# Altium PCB FOOTPRINT.PcbDoc (part 2 of 2)
Units mm, origin at the board's own origin, x right, y up, seen from the top; angles counter-clockwise.
Board outline 50 x 70 mm, 4 copper layers (Top Layer, Int1 (GND), Int2 (PWR), Bottom Layer), stack 1.446 mm thick; 76 components, 55 nets, 299 pads, 366 vias.
Unrouted connection lines stored in the file: 3.
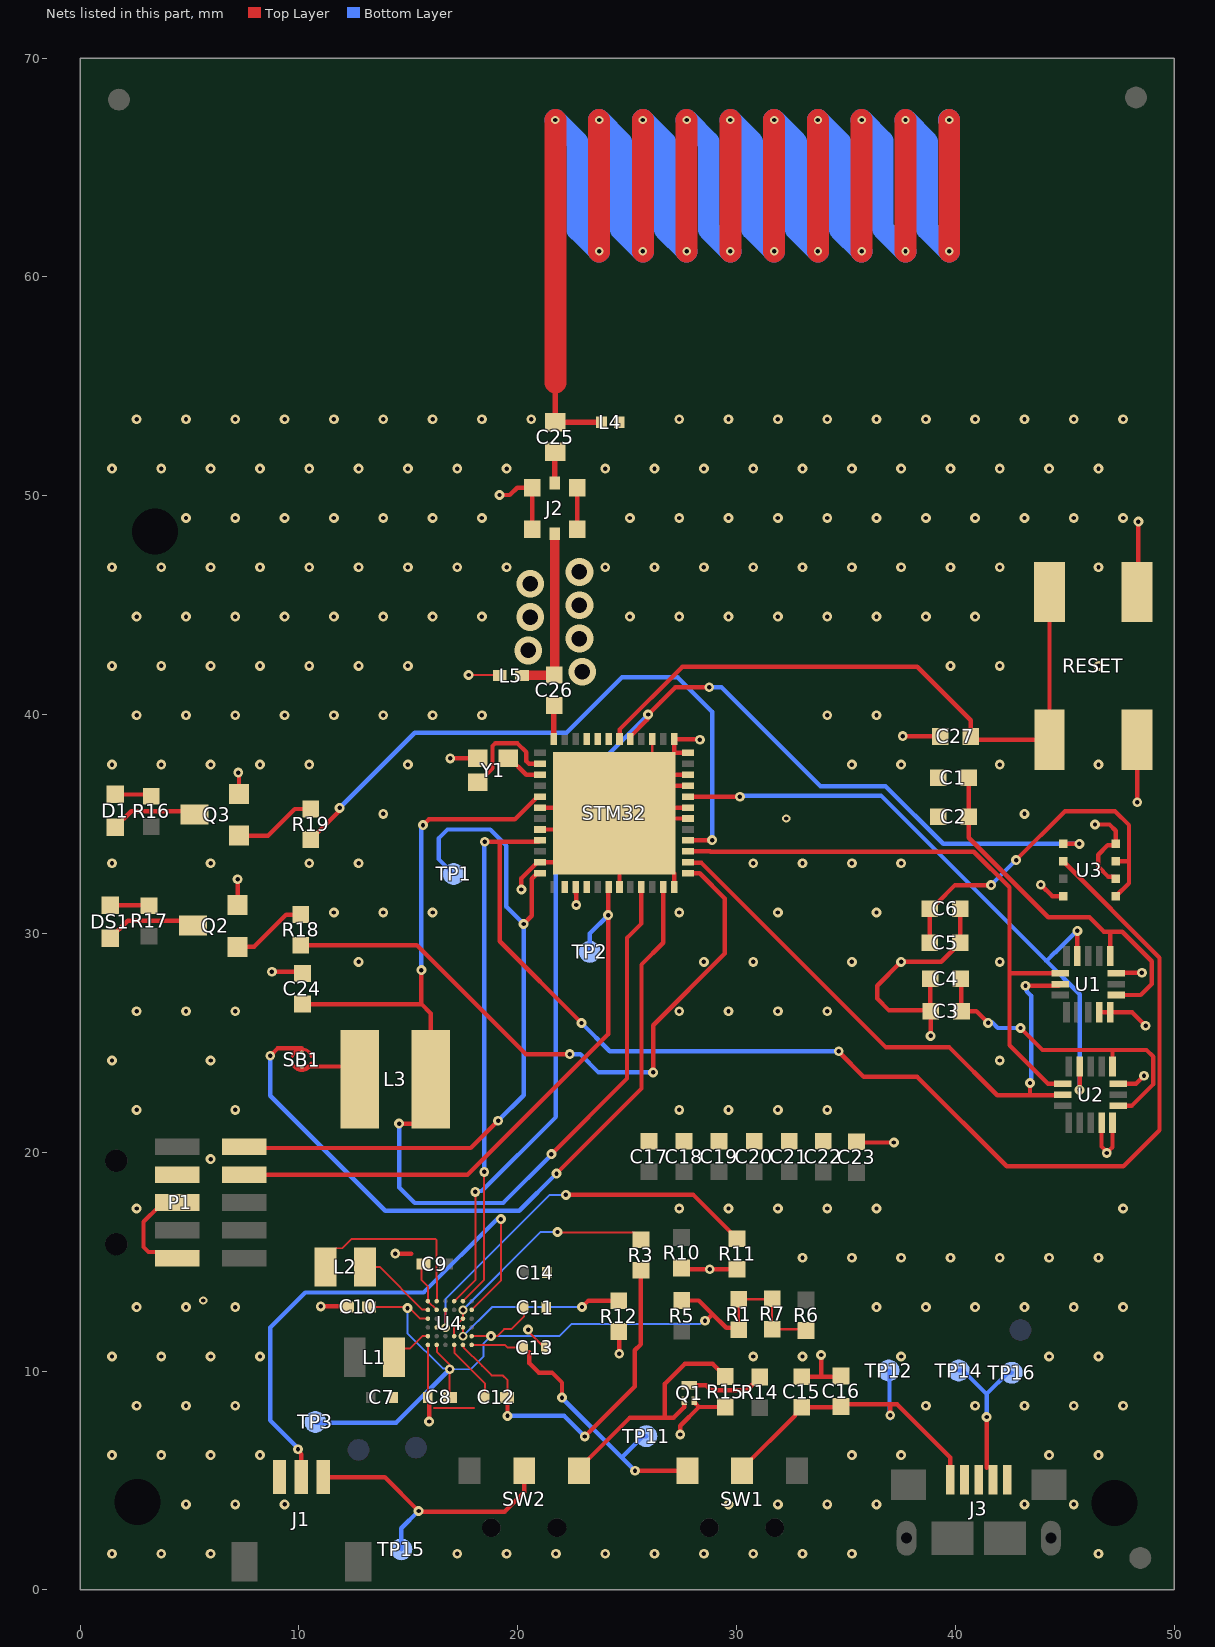
[diagram p4: the nets of this part, all layers, seen from the top]

## Via types
v1: diameter 0.45, hole 0.2, Top Layer to Bottom Layer, 334 vias
v2: diameter 0.38, hole 0.2, Top Layer to Bottom Layer, 21 vias
v3: diameter 1.27, hole 0.711, Top Layer to Bottom Layer, 7 vias
v4: diameter 0.4, hole 0.22, Top Layer to Bottom Layer, 4 vias

## Nets (pads, with @x,y where several pads share a name; then routed paths per layer and width w, separated by ;. In a path a pad name is that pad's centre, name@x,y a point inside that pad or via, vN(x,y) a via of type N, cw(c..) or ccw(c..) an arc to the next point about the centre after c; other vN are vias at no path point) (continued)
GND: C1.2 C2.2 C3.2 C4.2 C5.2 C6.2 C7.2 C8.2 C9.2 C10.2 C11.2 C12.2 C13.2 C14.2 C15.2 C16.2 C17.2 C18.2 C19.2 C20.2 C21.2 C22.2 C23.2 C24.2 C27.2 J1.1 J2.2 J3.2 J3.3 J3.4 J3.5 L4.2 L5.2 P1.3 P1.5 P1.9 Q1.2 Q2.E Q3.E R10.1 R11.2 R12.2 R15.2 RESET.2 STM32.6 STM32.7 STM32.9 STM32.10 STM32.12 STM32.13 STM32.15 STM32.19 STM32.20 STM32.21 STM32.30 STM32.32 STM32.35 STM32.38 STM32.39 STM32.40 STM32.43 STM32.48 STM32.49 TP14.1 TP16.1 U1.12 U1.13 U1.16 U2.12 U2.13 U2.16 U3.1 U3.5 U3.7 U4.A1 U4.B2 U4.F1 U4.F4 Y1.4 | length 122.4
  Top Layer w0.09: C9.2@15.697,14.884 15.596,14.783 15.596,14.173 15.896,13.873 15.896,13.204 U4.A1@15.9,13.2 ; C8.2@15.884,8.8 15.896,8.812 U4.F1@15.896,11.196 ; U4.A1@15.896,13.196 U4.B2@16.296,12.796 ; 16.18,8.306 18.009,8.306 ; U4.F4@17.1,11.2 17.1,10.84 18.5,9.44 C12.2@18.5,8.8 ; C14.2@21.316,14.5 C14.2@21.316,14.636
  Top Layer w0.102: P1.9@4.445,15.164 5.08,15.164 P1.9@5.409,15.493 ; P1.5@4.445,17.704 P1.5@5.08,17.704 ; Q2.E@7.188,31.293 Q2.E@7.214,31.318 ; C24.2@10.084,28.245 C24.2@10.16,28.169 ; C10.2@12.167,12.954 C10.2@12.192,12.929 ; v1(17.755,41.808) 19.152,41.808 L5.2@19.177,41.783 ; Y1.4@18.156,37.998 Y1.4@18.172,38.015 ; v1(20.475,11.893) 20.475,11.81 21.211,11.074 C13.2@21.274,11.074 ; J2.2@20.667,48.445 J2.2@20.667,48.47 ; STM32.35@20.9,33.25 STM32.35@21.025,33.25 ; STM32.38@22.15,32 STM32.38@22.15,32.125 ; STM32.49@22.15,33.25 23.65,34.75 STM32.49@24.4,35.5 ; J2.2@22.717,50.37 J2.2@22.717,50.395 ; STM32.49@23.15,36.75 24.15,35.75 STM32.49@24.4,35.5 ; R12.2@24.612,11.811 R12.2@24.638,11.785 ; STM32.15@26.15,38.875 STM32.49@26.15,37.25 ; STM32.49@27.15,32.75 24.65,35.25 STM32.49@24.4,35.5 ; STM32.49@27.15,38.25 STM32.49@26.15,37.25 ; Q1.2@28.063,8.647 Q1.2@28.094,8.616 ; C22.2@33.958,20.5 C22.2@33.96,20.498 ; C23.2@35.458,20.498 C23.2@35.484,20.472 C23.2@35.509,20.447 ; v1@37.567,39.014 v1(37.592,39.014) ; C3.2@38.865,26.437 C3.2@38.878,26.45 ; C27.2@39.286,39.014 C27.2@39.3,39 ; J3.5@42.366,5.037 J3.5@42.366,5.512 ; v1@46.914,20.025 v1@46.967,20.025 ; U1.16@47.351,28.186 U1.16@47.367,28.203 ; RESET.2@48.3,38.85 RESET.2@48.311,38.839 ; RESET.2@48.3,45.6 RESET.2@48.362,45.662 ; STM32.49@24.4,35.5 24.65,35.75 25.65,36.75 STM32.49@26.15,37.25
  Top Layer w0.127: L4.2@24.455,53.184 L4.2@24.637,53.365
  Top Layer w0.2: P1.5@3.6,17.525 2.9,16.825 2.9,15.672 3.128,15.444 4.165,15.444 P1.9@4.445,15.164 ; v1(7.2,32.475) 7.2,31.532 7.1,31.432 Q2.E@7.214,31.318 ; v1(7.225,37.35) 7.264,37.311 Q3.E@7.264,36.373 ; v1(8.763,28.245) C24.2@10.084,28.245 ; v1(10.998,12.954) C10.2@12.167,12.954 ; v1(14.402,15.367) 15.138,15.367 ; v1(15.951,7.696) 15.951,8.458 ; v1(16.916,37.998) Y1.4@18.156,37.998 ; v1(19.167,50.035) 19.638,50.035 19.974,50.37 J2.2@20.667,50.37 J2.2@20.667,48.47 ; v1(20.168,32.004) 20.168,32.518 STM32.35@20.9,33.25 ; STM32.35@21.025,33.25 STM32.49@22.15,33.25 ; STM32.32@21.025,34.75 STM32.49@23.65,34.75 ; STM32.30@21.025,35.75 STM32.49@24.15,35.75 ; 22.65,31.825 22.675,31.8 v1(22.675,31.3) ; J2.2@22.717,48.47 J2.2@22.717,50.37 ; v1(24.638,10.795) R12.2@24.638,11.785 ; STM32.43@24.65,32.125 24.65,35.25 STM32.6@27.775,35.25 ; STM32.49@24.65,35.75 STM32.7@27.775,35.75 ; STM32.49@25.65,36.75 STM32.9@27.775,36.75 ; STM32.49@26.15,37.25 STM32.10@27.775,37.25 ; STM32.48@27.15,32.125 STM32.49@27.15,32.75 ; v1(27.425,7.1) 27.425,7.5 28.279,8.354 28.279,8.357 ; R10.1@27.483,14.707 27.54,14.65 v1(28.775,14.65) 30.017,14.65 R11.2@30.023,14.656 ; STM32.12@27.775,38.25 27.15,38.25 STM32.13@27.15,38.875 28.3,38.875 v1(28.325,38.85) ; Q1.2@28.063,8.647 28.063,8.572 28.279,8.357 ; R15.2@29.489,8.357 28.279,8.357 ; C15.2@32.975,9.747 33.861,9.747 ; v1(33.861,10.736) 33.861,9.747 ; C16.2@34.775,9.775 34.747,9.747 33.861,9.747 ; 35.903,20.447 v1(37.186,20.447) ; v1(37.592,39.014) C27.2@39.286,39.014 ; C4.2@38.853,27.925 C3.2@38.853,26.483 ; v1(38.865,25.316) C3.2@38.865,26.437 ; C3.2@38.878,26.45 38.853,26.475 C3.2@38.853,26.483 ; C6.2@40.225,31.125 40.225,29.575 39.352,28.702 37.516,28.702 36.424,27.61 36.424,27.026 36.966,26.483 C3.2@38.853,26.483 ; 41.425,5.575 v1(41.425,7.9) ; v1(43.897,32.227) 44.431,31.693 U3.1@44.926,31.693 ; v1(46.38,34.976) 47.041,34.976 47.326,34.69 U3.5@47.326,34.093 47.268,34.035 46.96,34.035 46.525,33.6 46.525,33.05 46.992,32.583 47.236,32.583 U3.7@47.326,32.493 ; U1.12@46.576,26.398 U1.13@47.076,26.398 48.074,26.398 v1(48.692,25.781) ; U2.12@46.677,21.344 46.677,20.262 v1@46.914,20.025 ; v1@46.967,20.025 47.177,20.235 U2.13@47.177,21.344 ; U1.16@47.367,28.203 v1(48.523,28.203) ; U2.16@47.452,23.131 48.252,23.131 v1(48.616,23.495) ; v1(48.311,35.992) RESET.2@48.311,38.839 ; RESET.2@48.362,45.662 v1(48.362,48.819)
  Bottom Layer w0.2: TP14.1@40.15,10.025 40.35,10.025 41.425,8.95 ; v1(41.425,7.9) 41.425,8.95 ; TP16.1@42.577,9.924 42.399,9.924 41.425,8.95
  other v1: 1.457,1.652 3.711,1.652 5.965,1.652 17.235,1.652 19.489,1.652 21.743,1.652 23.997,1.652 26.251,1.652 28.505,1.652 30.759,1.652 33.013,1.652 35.267,1.652 46.537,1.652 4.838,3.906 7.092,3.906 9.346,3.906 29.632,3.906 31.886,3.906 34.14,3.906 36.394,3.906 43.156,3.906 45.41,3.906 1.457,6.16 3.711,6.16 5.965,6.16 8.219,6.16 35.267,6.16 37.521,6.16 44.283,6.16 46.537,6.16 2.584,8.414 4.838,8.414 7.092,8.414 38.648,8.414 40.902,8.414 43.156,8.414 45.41,8.414 47.664,8.414 1.457,10.668 3.711,10.668 5.965,10.668 8.219,10.668 30.759,10.668 33.013,10.668 37.521,10.668 44.283,10.668 46.537,10.668 2.584,12.922 4.838,12.922 7.092,12.922 36.394,12.922 38.648,12.922 40.902,12.922 43.156,12.922 45.41,12.922 47.664,12.922 33.013,15.176 35.267,15.176 37.521,15.176 39.775,15.176 42.029,15.176 44.283,15.176 46.537,15.176 2.584,17.43 27.378,17.43 29.632,17.43 31.886,17.43 34.14,17.43 36.394,17.43 47.664,17.43 5.965,19.684 46.914,19.964 2.584,21.938 7.092,21.938 27.378,21.938 29.632,21.938 31.886,21.938 34.14,21.938 1.457,24.192 5.965,24.192 42.029,24.192 2.584,26.446 4.838,26.446 7.092,26.446 27.378,26.446 29.632,26.446 31.886,26.446 34.14,26.446 12.727,28.7 28.505,28.7 30.759,28.7 35.267,28.7 37.521,28.7 42.029,28.7 11.6,30.954 13.854,30.954 16.108,30.954 27.378,30.954 31.886,30.954 36.394,30.954 1.457,33.208 5.965,33.208 10.473,33.208 12.727,33.208 30.759,33.208 33.013,33.208 35.267,33.208 37.521,33.208 13.854,35.462 43.156,35.462 1.457,37.716 3.711,37.716 5.965,37.716 8.219,37.716 10.473,37.716 14.981,37.716 35.267,37.716 37.521,37.716 42.029,37.716 46.537,37.716 2.584,39.97 4.838,39.97 7.092,39.97 9.346,39.97 11.6,39.97 13.854,39.97 16.108,39.97 18.362,39.97 34.14,39.97 36.394,39.97 1.457,42.224 3.711,42.224 5.965,42.224 8.219,42.224 10.473,42.224 12.727,42.224 14.981,42.224 39.775,42.224 42.029,42.224 46.537,42.224 2.584,44.478 4.838,44.478 7.092,44.478 9.346,44.478 11.6,44.478 13.854,44.478 16.108,44.478 18.362,44.478 25.124,44.478 27.378,44.478 29.632,44.478 31.886,44.478 34.14,44.478 36.394,44.478 38.648,44.478 40.902,44.478 1.457,46.732 3.711,46.732 5.965,46.732 8.219,46.732 10.473,46.732 12.727,46.732 14.981,46.732 17.235,46.732 19.489,46.732 23.997,46.732 26.251,46.732 28.505,46.732 30.759,46.732 33.013,46.732 35.267,46.732 37.521,46.732 39.775,46.732 42.029,46.732 46.537,46.732 4.838,48.986 7.092,48.986 9.346,48.986 11.6,48.986 13.854,48.986 16.108,48.986 18.362,48.986 25.124,48.986 27.378,48.986 29.632,48.986 31.886,48.986 34.14,48.986 36.394,48.986 38.648,48.986 40.902,48.986 43.156,48.986 45.41,48.986 47.664,48.986 1.457,51.24 3.711,51.24 5.965,51.24 8.219,51.24 10.473,51.24 12.727,51.24 14.981,51.24 17.235,51.24 19.489,51.24 23.997,51.24 26.251,51.24 28.505,51.24 30.759,51.24 33.013,51.24 35.267,51.24 37.521,51.24 39.775,51.24 42.029,51.24 44.283,51.24 46.537,51.24 2.584,53.494 4.838,53.494 7.092,53.494 9.346,53.494 11.6,53.494 13.854,53.494 16.108,53.494 18.362,53.494 20.616,53.494 27.378,53.494 29.632,53.494 31.886,53.494 34.14,53.494 36.394,53.494 38.648,53.494 40.902,53.494 43.156,53.494 45.41,53.494 47.664,53.494
  other v2: 5.625,13.225 32.275,35.25
  other v3: 22.944,41.954 20.475,42.934 22.815,43.473 20.568,44.455 22.815,44.997 20.568,45.979 22.815,46.521
ICS: R12.1 U4.D5 U4.E5 | length 8.2
  Top Layer w0.09: v4(17.496,11.596) U4.D5@17.496,11.996
  Top Layer w0.2: v1(22.936,12.929) 23.216,13.208 R12.1@24.612,13.208
  Bottom Layer w0.09: v4(17.496,11.596) 18.829,12.929 v1(22.936,12.929)
JTCK-SWCLK: P1.4 STM32.42 TP2.1 | length 28.1
  Top Layer w0.2: P1.4@7.495,18.974 P1.4@7.495,18.974 17.705,18.975 24.13,25.4 v1(24.13,30.836) 24.13,32.105 STM32.42@24.15,32.125
  Bottom Layer w0.102: v1@24.13,30.741 v1(24.13,30.836)
  Bottom Layer w0.2: TP2.1@23.292,29.159 23.292,29.997 v1(24.13,30.836)
JTMS-SWDIO: P1.2 STM32.36 TP1.1 | length 33.7
  Top Layer w0.2: P1.2@7.495,20.244 7.546,20.193 17.856,20.193 v1(19.101,21.438) ; v1(20.269,30.429) 20.645,30.805 20.645,32.495 20.85,32.7 20.975,32.7 STM32.36@21.025,32.75
  Bottom Layer w0.2: TP1.1@17.069,32.715 16.383,33.401 16.383,34.341 16.789,34.747 18.745,34.747 19.482,34.011 19.482,31.217 v1(20.269,30.429) 20.269,22.606 v1(19.101,21.438)
MISO: STM32.2 U1.7 U2.7 | length 28.3
  Top Layer w0.2: STM32.2@27.775,33.25 27.802,33.223 28.397,33.223 36.83,24.79 39.726,24.79 41.91,22.606 43.409,22.606 ; v1(43.205,27.61) 44.724,27.61 U1.7@44.801,27.686 ; v1(43.409,23.165) 43.409,22.606 ; U2.7@44.902,22.631 44.877,22.606 43.409,22.606
  Bottom Layer w0.2: v1(43.205,27.61) 43.253,27.562 43.253,27.359 43.459,27.153 43.459,23.392 43.456,23.389 43.456,23.213 v1(43.409,23.165)
MOSI: STM32.3 U1.6 U2.6 | length 28.1
  Top Layer w0.2: STM32.3@27.775,33.75 28.785,33.75 28.804,33.731 40.843,33.731 42.469,32.106 42.469,28.186 ; U1.6@44.801,28.186 42.469,28.186 ; U2.6@44.902,23.131 44.229,23.131 42.469,24.892 42.469,28.186
Net*1_1: C25.2 L4.1 | length 131.4
  Top Layer w0.254: 21.717,55.169 C25.2@21.717,53.355 21.728,53.365 L4.1@23.827,53.365
  Top Layer w1: 21.717,55.169 v2(21.717,67.169) ; v2(23.717,61.169) v2(23.717,67.169) ; v2(25.717,61.169) v2(25.717,67.169) ; v2(27.717,61.169) v2(27.717,67.169) ; v2(29.717,61.169) v2(29.717,67.169) ; v2(31.717,61.169) v2(31.717,67.169) ; v2(33.717,61.169) v2(33.717,67.169) ; v2(35.717,61.169) v2(35.717,67.169) ; v2(37.717,61.169) v2(37.717,67.169) ; v2(39.717,61.169) v2(39.717,67.169)
  Bottom Layer w1: v2(21.717,67.169) 22.733,66.153 22.733,62.153 v2(23.717,61.169) ; v2(23.717,67.169) 24.714,66.172 24.714,62.172 v2(25.717,61.169) ; v2(25.717,67.169) 26.721,66.165 26.721,62.165 v2(27.717,61.169) ; v2(27.717,67.169) 28.727,66.159 28.727,62.159 v2(29.717,61.169) ; v2(29.717,67.169) 30.709,66.177 30.709,62.177 v2(31.717,61.169) ; v2(31.717,67.169) 32.715,66.171 32.715,62.171 v2(33.717,61.169) ; v2(33.717,67.169) 34.722,66.164 34.722,62.164 v2(35.717,61.169) ; v2(35.717,67.169) 36.678,66.208 36.678,62.208 v2(37.717,61.169) ; v2(37.717,67.169) 38.71,66.176 38.71,62.176 v2(39.717,61.169) ; v2@39.713,67.173 v2(39.717,67.169)
NetC1_1: C1.1 C2.1 U1.1 U1.14 | length 17.4
  Top Layer w0.2: C1.1@40.607,37.119 40.615,37.111 C2.1@40.615,35.331 40.615,34.366 44.247,30.734 46.126,30.734 46.787,30.074 47.079,30.074 ; U1.1@47.076,28.974 47.076,30.07 47.079,30.074 ; U1.14@47.351,27.186 48.471,27.186 48.971,27.686 48.971,28.727 47.625,30.074 47.079,30.074
NetC3_1: C3.1 C4.1 U2.1 U2.14 | length 15
  Top Layer w0.2: C4.1@40.25,27.925 40.275,27.9 C3.1@40.275,26.45 40.956,26.45 v1(41.493,25.913) ; v1(42.977,25.679) 43.981,24.675 47.177,24.675 ; U2.1@47.177,23.919 47.177,24.675 ; U2.14@47.452,22.131 48.065,22.131 49.047,23.114 49.047,24.359 48.731,24.675 47.177,24.675
  Bottom Layer w0.2: v1@41.669,25.946 41.935,25.679 42.926,25.679 42.951,25.705 v1(42.977,25.679)
NetC5_1: C5.1 C6.1 U3.6 U3.8 | length 16.9
  Top Layer w0.2: C5.1@38.826,29.573 38.828,29.575 C6.1@38.828,31.125 39.109,31.406 39.181,31.406 39.982,32.207 v1(41.631,32.207) ; v1(42.774,33.35) 45.009,35.585 47.295,35.585 47.93,34.95 47.93,33.344 ; U3.8@47.326,31.693 47.93,32.296 47.93,33.344 ; U3.6@47.326,33.293 47.879,33.293 47.93,33.344
  Bottom Layer w0.2: v1(41.631,32.207) v1(42.774,33.35)
NetC25_1: C25.1 J2.1 | length 1.4
  Top Layer w0.254: J2.1@21.692,50.58 21.692,51.979 C25.1@21.717,52.005
NetC26_2: C26.2 J2.3 L5.1 | length 7.9
  Top Layer w0.254: C26.2@21.666,41.808 C26.2@21.692,41.834
  Top Layer w0.445: L5.1@20.193,41.783 20.206,41.796 21.653,41.796 C26.2@21.666,41.808 ; C26.2@21.692,41.834 J2.3@21.692,48.26
NetD1_1: D1.1 Q3.C | length 4
  Top Layer w0.2: D1.1@1.6,34.85 2.337,35.587 5.079,35.587 Q3.C@5.232,35.433
NetD1_2: D1.2 R16.2 | length 1.7
  Top Layer w0.2: D1.2@1.6,36.35 3.172,36.35 R16.2@3.251,36.271
NetDS1_1: DS1.1 R17.1 | length 1.8
  Top Layer w0.2: DS1.1@1.372,31.281 3.136,31.281 R17.1@3.15,31.267
NetDS1_2: DS1.2 Q2.C | length 4.2
  Top Layer w0.2: DS1.2@1.372,29.781 2.172,30.582 4.928,30.582 Q2.C@5.156,30.353
NetL3_1: L3.1 SB1.2 | length 3.2
  Top Layer w0.152: 9.781,23.919 SB1.2@10.135,23.919 ; L3.1@12.2,23.919 L3.1@12.777,23.343
  Top Layer w0.2: SB1.2@10.135,23.919 10.488,23.919 L3.1@12.2,23.919
NetQ1_1: Q1.1 R15.1 SW2.3 | length 11.3
  Top Layer w0.2: SW2.3@22.795,5.445 22.795,5.545 25.125,7.875 26.725,7.875 ; Q1.1@27.638,8.622 Q1.1@27.613,8.647 27.6,8.634 27.6,8.35 27.125,7.875 26.725,7.875 ; R15.1@29.489,9.754 28.905,10.338 27.638,10.338 26.725,9.425 26.725,7.875
NetQ1_3: Q1.3 R14.2 | length 3.6
  Top Layer w0.2: Q1.3@27.838,9.347 28.613,9.347 28.835,9.125 30.461,9.125 R14.2@31.064,9.728
NetQ2_B: Q2.B R18.2 | length 3.5
  Top Layer w0.2: Q2.B@7.188,29.388 7.95,29.388 9.423,30.861 R18.2@10.084,30.861
NetQ3_B: Q3.B R19.2 | length 3.8
  Top Layer w0.2: Q3.B@7.264,34.468 8.585,34.468 9.804,35.687 R19.2@10.541,35.687
NetR11_1: R11.1 U4.B3 | length 18.3
  Top Layer w0.09: v4(16.696,11.981) U4.B3@16.696,12.796
  Top Layer w0.102: R11.1@30.023,16.053 R11.1@30.048,16.078
  Top Layer w0.2: v1(22.2,18.05) 28.026,18.05 R11.1@30.023,16.053
  Bottom Layer w0.09: v4(16.696,11.981) 16.696,13.292 21.454,18.05 v1(22.2,18.05)
NRST: C27.1 RESET.1 STM32.18 | length 29.8
  Top Layer w0.2: STM32.18@24.65,38.875 24.655,38.88 24.655,39.319 27.525,42.189 38.252,42.189 40.697,39.745 C27.1@40.697,39 40.847,38.85 RESET.1@44.3,38.85 RESET.1@44.3,45.6
OSC_IN: STM32.26 Y1.1 | length 4.8
  Top Layer w0.2: Y1.1@18.172,36.915 18.222,36.915 18.847,37.54 18.847,38.567 18.964,38.684 19.99,38.684 20.396,38.278 20.396,37.867 20.513,37.75 STM32.26@21.025,37.75
OSC_OUT: STM32.27 Y1.3 | length 1.8
  Top Layer w0.2: Y1.3@19.572,38.015 19.622,38.015 20.387,37.25 STM32.27@21.025,37.25
PA1: STM32.8 U1.4 U2.4 | length 30.3
  Top Layer w0.2: STM32.8@27.775,36.25 27.777,36.248 30.148,36.248 v1(30.15,36.246) ; U1.4@45.576,28.974 v1(45.576,30.116) ; v1(45.677,22.852) U2.4@45.677,23.919
  Bottom Layer w0.2: v1(30.15,36.246) 30.198,36.294 30.374,36.294 30.377,36.297 36.601,36.297 44.158,28.74 ; v1(45.576,30.116) 45.56,30.116 44.59,29.146 44.564,29.146 44.158,28.74 ; v1(45.677,22.852) 45.677,27.221 44.158,28.74
PA9: STM32.17 U3.4 U4.A4 | length 56.2
  Top Layer w0.09: U4.A4@17.096,13.196 18.059,14.159 v1(18.059,18.186) ; STM32.17@25.15,38.875 STM32.17@25.255,38.98 ; v1@25.883,40.006 v1(25.959,40.005)
  Top Layer w0.2: STM32.17@25.15,38.875 25.15,39 25.911,39.761 25.911,39.961 25.955,40.005 v1(25.959,40.005) ; v1(25.959,40.005) v1(25.959,40.005) 26.542,40.588 27.203,41.25 v1(28.753,41.25) ; U3.4@44.926,34.093 v1(45.663,34.093)
  Bottom Layer w0.2: v1(18.059,18.186) 18.104,18.231 18.358,18.231 21.742,21.615 21.742,35.789 v1(25.959,40.005) ; v1(28.753,41.25) 29.312,41.25 33.833,36.728 36.805,36.728 39.44,34.093 v1(45.663,34.093)
PA10: STM32.33 U3.3 U4.A5 | length 77.7
  Top Layer w0.09: U4.A5@17.496,13.196 18.466,14.166 v1(18.466,19.101) ; STM32.33@20.963,34.188 STM32.33@21.025,34.25
  Top Layer w0.2: v1(18.491,34.188) 19.177,34.188 ; STM32.33@20.963,34.188 19.177,34.188 ; v1(22.911,25.908) 19.177,29.642 19.177,34.188 ; v1(34.671,24.613) 34.671,24.587 35.814,23.444 38.252,23.444 42.342,19.355 47.676,19.355 49.327,21.006 49.327,28.893 U3.3@44.926,33.293
  Bottom Layer w0.09: v1@18.466,34.163 v1(18.491,34.188)
  Bottom Layer w0.2: v1(18.466,19.101) v1@18.466,34.163 ; v1(22.911,25.908) 24.206,24.613 v1(34.671,24.613)
PB3: R18.1 STM32.1 | length 30
  Top Layer w0.2: R18.1@10.084,29.464 15.392,29.464 20.371,24.486 v1(22.377,24.486) ; v1(26.187,23.647) 26.187,25.806 29.464,29.083 29.464,31.598 28.312,32.75 STM32.1@27.775,32.75
  Bottom Layer w0.2: v1(22.377,24.486) 22.854,24.486 23.692,23.647 v1(26.187,23.647)
PB6: R19.1 STM32.4 | length 29.1
  Top Layer w0.2: R19.1@10.541,34.29 11.814,35.563 11.814,35.69 v1(11.862,35.738) ; STM32.4@27.775,34.25 28.865,34.25 v1(28.88,34.265)
  Bottom Layer w0.2: v1(11.862,35.738) 15.291,39.167 22.225,39.167 24.765,41.707 27.305,41.707 28.88,40.132 v1(28.88,34.265)
PGOOD1: R3.1 U4.B5 U4.C5 U4.E4 | length 11.1
  Top Layer w0.09: U4.E4@17.096,11.596 17.096,11.996 U4.C5@17.496,12.396 v4(17.496,12.796) ; v1(21.819,16.358) 21.838,16.338 25.293,16.338 R3.1@25.629,16.002
  Bottom Layer w0.09: v4(17.496,12.796) 17.52,12.796 17.52,12.82 21.058,16.358 v1(21.819,16.358)
SW1: L1.1 U4.E1 | length 1.7
  Top Layer w0.09: L1.1@14.389,11.024 15.068,11.024 15.64,11.596 U4.E1@15.896,11.596 U4.E1@15.9,11.6
SW2A: L2.1 U4.B1 | length 3.7
  Top Layer w0.09: L2.1@13.017,14.757 13.691,14.757 15.645,12.804 15.896,12.804 U4.B1@15.9,12.8
SW2B: L2.2 U4.A2 | length 8.6
  Top Layer w0.09: L2.2@11.217,14.757 11.217,15.157 11.672,15.612 11.98,15.612 12.395,16.027 16.244,16.027 16.297,15.975 16.297,14.26 16.3,14.257 U4.A2@16.3,13.2
THR: J1.2 U4.B6 | length 24.8
  Top Layer w0.09: J1.2@10.066,5.199 J1.2@10.109,5.156 ; U4.B6@17.896,12.796 17.901,12.796 17.901,12.801 19.228,14.128 v1(19.228,16.942)
  Top Layer w0.2: v1(9.957,6.426) 9.957,6.359 10.109,6.206 J1.2@10.109,5.156
  Bottom Layer w0.09: v1(9.957,6.426) v1@9.957,6.477
  Bottom Layer w0.2: v1@9.957,6.477 8.687,7.747 8.687,11.989 10.287,13.589 15.697,13.589 19.05,16.942 v1(19.228,16.942)
VBUS: C13.1 SW1.1 TP11.1 U4.F6 | length 14.5
  Top Layer w0.09: U4.F6@17.9,11.2 17.904,11.196 19.411,11.196 19.533,11.074 C13.1@20.258,11.074 20.322,11.074 20.531,10.865
  Top Layer w0.2: 20.531,10.865 20.531,10.356 20.955,9.931 21.565,9.931 22.022,9.474 v1(22.022,8.788) ; v1(25.355,5.445) SW1.1@27.753,5.445
  Bottom Layer w0.09: v1(22.022,8.788) 22.022,8.763 v1@22.034,8.763
  Bottom Layer w0.2: v1@22.034,8.763 24.749,6.049 ; v1(25.355,5.445) 25.353,5.445 24.749,6.049 ; TP11.1@25.875,7.025 25.725,7.025 24.749,6.049
VBUS': C15.1 C16.1 J3.1 SW1.2 TP12.1 | length 15.5
  Top Layer w0.2: SW1.2@30.253,5.445 SW1.2@30.32,5.512 ; SW1.2@30.253,5.545 32.694,7.986 32.694,8.069 C15.1@32.975,8.35 34.675,8.35 C16.1@34.711,8.314 ; C16.1@34.775,8.378 34.875,8.478 37.025,8.478 ; v1(37.025,7.978) 37.025,8.478 ; J3.1@39.766,5.037 39.766,6.05 37.338,8.478 37.025,8.478
  Bottom Layer w0.2: TP12.1@36.95,10.025 36.988,9.987 36.988,7.888 v1@37.025,7.85
VDD: C12.1 R3.2 U4.F5 | length 17
  Top Layer w0.09: U4.F5@17.5,11.2 17.519,11.181 17.519,11.088 18.371,10.236 18.803,9.804 19.302,9.804 19.533,9.574 19.533,8.817 C12.1@19.516,8.8
  Top Layer w0.2: C12.1@19.516,8.8 19.533,8.783 v1(19.533,7.95) ; v1(23.063,7.01) 25.349,9.296 25.349,10.947 25.629,11.227 R3.2@25.629,14.605
  Bottom Layer w0.2: v1(19.533,7.95) 22.123,7.95 v1(23.063,7.01)
VDDRF1V155: C24.1 L3.2 STM32.29 STM32.45 | length 51.2
  Top Layer w0.102: STM32.29@20.9,36.25 STM32.29@21.025,36.25
  Top Layer w0.2: C24.1@10.16,26.772 15.596,26.772 ; v1(14.58,21.311) 15.252,21.311 16.027,22.086 L3.2@16.027,23.343 16.027,26.34 15.596,26.772 ; v1(15.596,28.321) 15.596,26.772 ; v1(15.672,34.95) 15.94,35.218 19.868,35.218 STM32.29@20.9,36.25 ; v1(21.539,19.914) 24.994,23.368 24.994,29.794 25.65,30.451 STM32.45@25.65,32.125
  Bottom Layer w0.2: v1(14.58,21.311) 14.58,18.39 15.291,17.678 19.329,17.678 21.539,19.888 v1(21.539,19.914) ; v1(15.596,28.321) 15.596,34.874 v1(15.672,34.95)
VIDI: U4.D2
VIN1: C8.1 C10.1 C11.1 R1.1 R1.2 R5.1 R6.1 R7.1 R7.2 TP3.1 U4.C1 U4.E6 U4.F2 | length 42
  Top Layer w0.09: C10.1@13.208,12.929 14.91,12.929 v1(14.961,12.878) 15.058,12.878 15.541,12.395 U4.C1@15.816,12.395 ; U4.F2@16.3,11.143 16.3,10.878 16.891,10.287 v1(16.891,10.084) 16.891,8.943 16.84,8.893 16.916,8.816 C8.1@16.9,8.8 ; U4.E6@17.896,11.596 17.9,11.6 19.068,11.6 19.38,11.913 19.696,11.913 20.295,12.511 20.295,12.889 C11.1@20.284,12.9
  Top Layer w0.102: R1.1@30.099,11.887 30.099,11.975 R1.2@30.099,13.284 31.598,13.284 R7.2@31.623,13.31 R7.1@31.623,11.913 33.135,11.913 R6.1@33.175,11.953
  Top Layer w0.2: R5.1@27.5,13.225 28.275,13.225 28.9,12.6 ; v1(28.556,12.3) 28.6,12.3 28.9,12.6 ; R1.1@30.099,11.887 30.011,11.975 29.525,11.975 28.9,12.6
  Bottom Layer w0.09: v1(14.961,12.878) 14.961,11.735 16.587,10.109 16.866,10.109 v1(16.891,10.084) 17.856,10.084 18.44,10.668 18.44,11.265 v1(18.776,11.6) 21.9,11.6 22.45,12.15 28.325,12.15 28.475,12.3 v1(28.556,12.3)
  Bottom Layer w0.2: TP3.1@10.75,7.675 10.78,7.645 14.453,7.645 v1(16.891,10.084)
VLi-Ion': J1.3 SW2.2 TP15.1 | length 13.5
  Top Layer w0.2: J1.3@11.109,5.156 13.919,5.156 v1(15.469,3.607) 15.5,3.575 19.4,3.575 20.295,4.47 SW2.2@20.295,5.445 SW2.2@20.048,5.445
  Bottom Layer w0.2: TP15.1@14.681,1.854 14.681,2.819 v1(15.469,3.607)
VLXSMPS: SB1.1 STM32.47 | length 34.7
  Top Layer w0.2: v1(8.687,24.409) 9.021,24.744 10.135,24.744 10.135,24.719 SB1.1@10.135,24.544 ; v1(21.768,19.025) 25.654,22.911 25.654,28.575 26.65,29.571 STM32.47@26.65,32.125
  Bottom Layer w0.2: v1(8.687,24.409) 8.687,22.581 13.945,17.323 20.066,17.323 v1(21.768,19.025)
VR_PA: C26.1 STM32.24 | length 1.5
  Top Layer w0.254: STM32.24@21.65,38.875 21.65,40.395 C26.1@21.666,40.411
pads on no net: J1.0 J3.6 P1.0 P1.6 P1.7 P1.8 P1.10 STM32.22 STM32.23 STM32.25 SW1.0 SW1.3 SW2.0 U1.2 U1.3 U1.5 U1.9 U1.10 U1.15 U2.2 U2.3 U2.5 U2.9 U2.10 U2.15 U4. U4.C2 U4.E3 Y1.2
copper on no net: | length 0
  Top Layer w0.127: 22.15,38.875 22.183,38.908

## Polygon pours and split planes (outlines as drawn)
GND on Top Layer "GND_L01_P004" (solid, pour order 4): 6.025,15.775 6.05,15.75 6.05,13.9 7.925,13.9 9.35,12.475 9.35,6.425 9.65,6.125 9.65,-1.5 10.3,-2.15 9.85,-2.6 -2.05,-2.6 -2.05,15.85 -2.025,15.875 -2.025,17.9 2.275,17.9 2.9,17.275 2.9,15.926 2.05,15.926
GND on Top Layer "GND_L01_P009" (solid, pour order 9): 21.623,55.075 49.475,55.075 49.525,55.125 49.525,38.9 46.225,38.9 44.525,40.6 23,40.6 22.95,40.55 22.95,51.4 21.85,51.4 21.65,51.6
GND on Top Layer "GND_L01_P013" (solid, pour order 13): 0.075,28.625 8.15,28.625 8.225,28.55 8.2,28.525 8.2,25.45 11.8,25.45 11.9,25.35 11.9,20.95 11.725,20.95 11.725,20.775 10.8,20.875 10.2,20.65 9.725,20.65 8.75,20.65 6.075,20.65 5.85,20.875 5.75,20.775 5.75,17.1 -0.2,17.1 -0.55,17.45
GND on Top Layer "GND_L01_P012" (solid, pour order 12): 8.2,37.4 8.2,25.45 8.45,25.2 17.7,25.2 17.7,37.387 17.622,37.465
GND on Top Layer "GND_L01_P011" (solid, pour order 11): 51.4,19.675 49,19.675 36.425,19.675 36.425,18.175 36.225,17.975 32.275,17.975 32.275,14.45 32.5,14.225 34.25,14.225 34.25,10.75 34.2,10.7 34.35,10.55 35.65,10.55 35.65,-0.625 36.05,-1.025 51.175,-1.025
GND on Top Layer "GND_L01_P008" (solid, pour order 8): 21.717,55.169 21.623,55.075 0.55,55.075 0.55,36.675 0.925,37.05 16.6,37.05 16.6,39.075 16.675,39.15 16.7,39.125 19.025,39.125 19.025,43.311 19.022,43.315 19.107,43.4 20.6,43.4 20.6,51.05 20.83,51.28 21.692,51.28
GND on Top Layer "Top Layer-No Net" (solid, pour order 0): 22.241,50.057 22.53,49.97 22.795,49.828 23.028,49.636 23.219,49.404 23.361,49.138 23.449,48.85 23.478,48.55 23.478,47.97 23.455,47.736 23.455,42.799 23.467,42.777 23.554,42.489 23.584,42.189 23.584,41.427 23.554,41.128 23.467,40.839 23.325,40.574 23.134,40.341 22.901,40.15 22.635,40.008 22.347,39.92 22.047,39.891 21.285,39.891 20.985,39.92 20.697,40.008 20.692,40.01 20.511,39.993 19.875,39.993 19.576,40.022 19.288,40.109 19.022,40.251 18.789,40.443 18.598,40.675 18.456,40.941 18.369,41.229 18.339,41.529 18.339,42.037 18.369,42.337 18.456,42.625 18.598,42.891 18.789,43.123 19.022,43.315 19.288,43.457 19.576,43.544 19.875,43.573 19.928,43.573 19.928,47.736 19.905,47.97 19.905,48.55 19.935,48.85 20.022,49.138 20.164,49.404 20.355,49.636 20.588,49.828 20.854,49.97 21.142,50.057 21.442,50.086 21.942,50.086
GND on Bottom Layer "GND_L04_P018" (solid, pour order 18): 33.985,23.597 33.96,23.571 27.051,23.571 23.165,19.685 23.012,19.685 23.012,13.691 24.155,12.548 24.155,-1.499 25.095,-2.438 53.111,-2.438 53.111,19.38 52.349,20.142 37.44,20.142 34.773,22.758
GND on Bottom Layer "GND_L04_P017" (solid, pour order 17): 30.825,35.75 30.775,35.8 30.825,35.75 30.775,35.8 30.775,34.6 42.4,22.975 43.1,23.675 43.1,26.825 42.6,27.325 42.65,27.375 42.65,29.2 42.45,29.2 36.65,35 35.2,35 34.575,35.625 30.95,35.625
GND on Bottom Layer "GND_L04_P016" (solid, pour order 16): 22.337,34.75 22.35,34.737 22.35,28.05 24.6,25.8 35.575,25.8 35.575,28.75 30.575,33.75 28.175,33.75 27.875,34.05 27.875,38.425 28.575,38.425 28.75,38.6 28.725,38.625 28.725,39.55 27.935,39.55 27.553,39.932 22.372,34.75
GND on Bottom Layer "GND_L04_P015" (solid, pour order 15): 0.25,54.925 0.4,55.075 49.475,55.075 49.475,32.95 49.325,32.8 47.2,34.925 39.425,34.925 37.125,37.225 34.352,37.225 29.625,41.952 29.625,42 24.675,42 24.45,42.225 22.075,39.85 22.075,39.625 14.8,39.625 11.4,36.225 11.4,35.225 14.7,35.225 15,34.925 15,22.85 14.975,22.875 10.525,22.875 10.525,24.025 8.625,25.925 7.85,25.15 7.85,0.425 8,0.275 6.075,-1.65 -0.625,-1.65 -0.625,55.025
GND on Int1 (GND) (split plane): 49.49,0.51 0.51,0.51 0.51,69.49 49.49,69.49
3.3VDD on Int2 (PWR) (split plane): 49.49,0.51 0.51,0.51 0.51,69.49 49.49,69.49

## Other copper
Top Layer:
  rectangle net VIN1: 19.66,12.268 20.752,13.538
  rectangle net GND: 22.95,37.975 24.35,39.225
  rectangle net GND: 22,31.75 23.325,32.9
  rectangle net GND: 3.175,17.1 5.75,19.6
  rectangle net 3.3VDD: 25.05,18.25 36.425,19.675
  rectangle net GND: 25.05,19.875 36.325,21.45
  rectangle net GND: 38.15,34.45 39.95,39.875
  rectangle net GND: 40.1,4.3 42.775,5.775
  rectangle net 1V8: 11.684,8.179 13.564,12.141
  rectangle net GND: 20.98,10.439 21.971,15.164
  rectangle net GND: 17.856,8.153 18.948,9.423
  rectangle net BSNS: 19.634,13.818 20.752,15.215
  rectangle net GND: 13.868,8.128 16.307,9.55
  rectangle net GND: 14.935,14.173 16.027,15.646
  rectangle net 3.3VDD: 16.459,14.148 17.501,15.596
  pour cut-out: 22.039,48.784 22.121,48.729 22.176,48.647 22.195,48.55 22.195,47.97 22.176,47.873 22.172,47.867 22.172,42.405 22.227,42.369 22.282,42.287 22.301,42.189 22.301,41.427 22.282,41.33 22.227,41.248 22.144,41.193 22.047,41.174 21.285,41.174 21.188,41.193 21.106,41.248 21.061,41.315 20.638,41.315 20.608,41.295 20.511,41.275 19.875,41.275 19.778,41.295 19.696,41.35 19.641,41.432 19.622,41.529 19.622,42.037 19.641,42.134 19.696,42.216 19.778,42.271 19.875,42.291 20.511,42.291 20.582,42.276 21.049,42.276 21.051,42.287 21.106,42.369 21.188,42.424 21.211,42.428 21.211,47.867 21.207,47.873 21.188,47.97 21.188,48.55 21.207,48.647 21.262,48.729 21.344,48.784 21.442,48.804 21.942,48.804

## Silkscreen, mask and mechanical layers (free items; w line width, h text height)
Top Overlay:
  text "FEEL 2020 / FRAN ACIEN / BEATRIZ MARTINEZ" at 35.117,13.7 h0.8

## Text inside footprints (layer, text, board x,y; h text height)
P1: Top Overlay "1" at 4.01,21.384 h1.02 r270